# Altium PCB PCB.PcbDoc
Units mm, origin at the board's own origin, x right, y up, seen from the top; angles counter-clockwise.
Board outline 50 x 50 mm, 2 copper layers (Top Layer, Bottom Layer); 12 components, 10 nets, 38 pads, 0 vias.
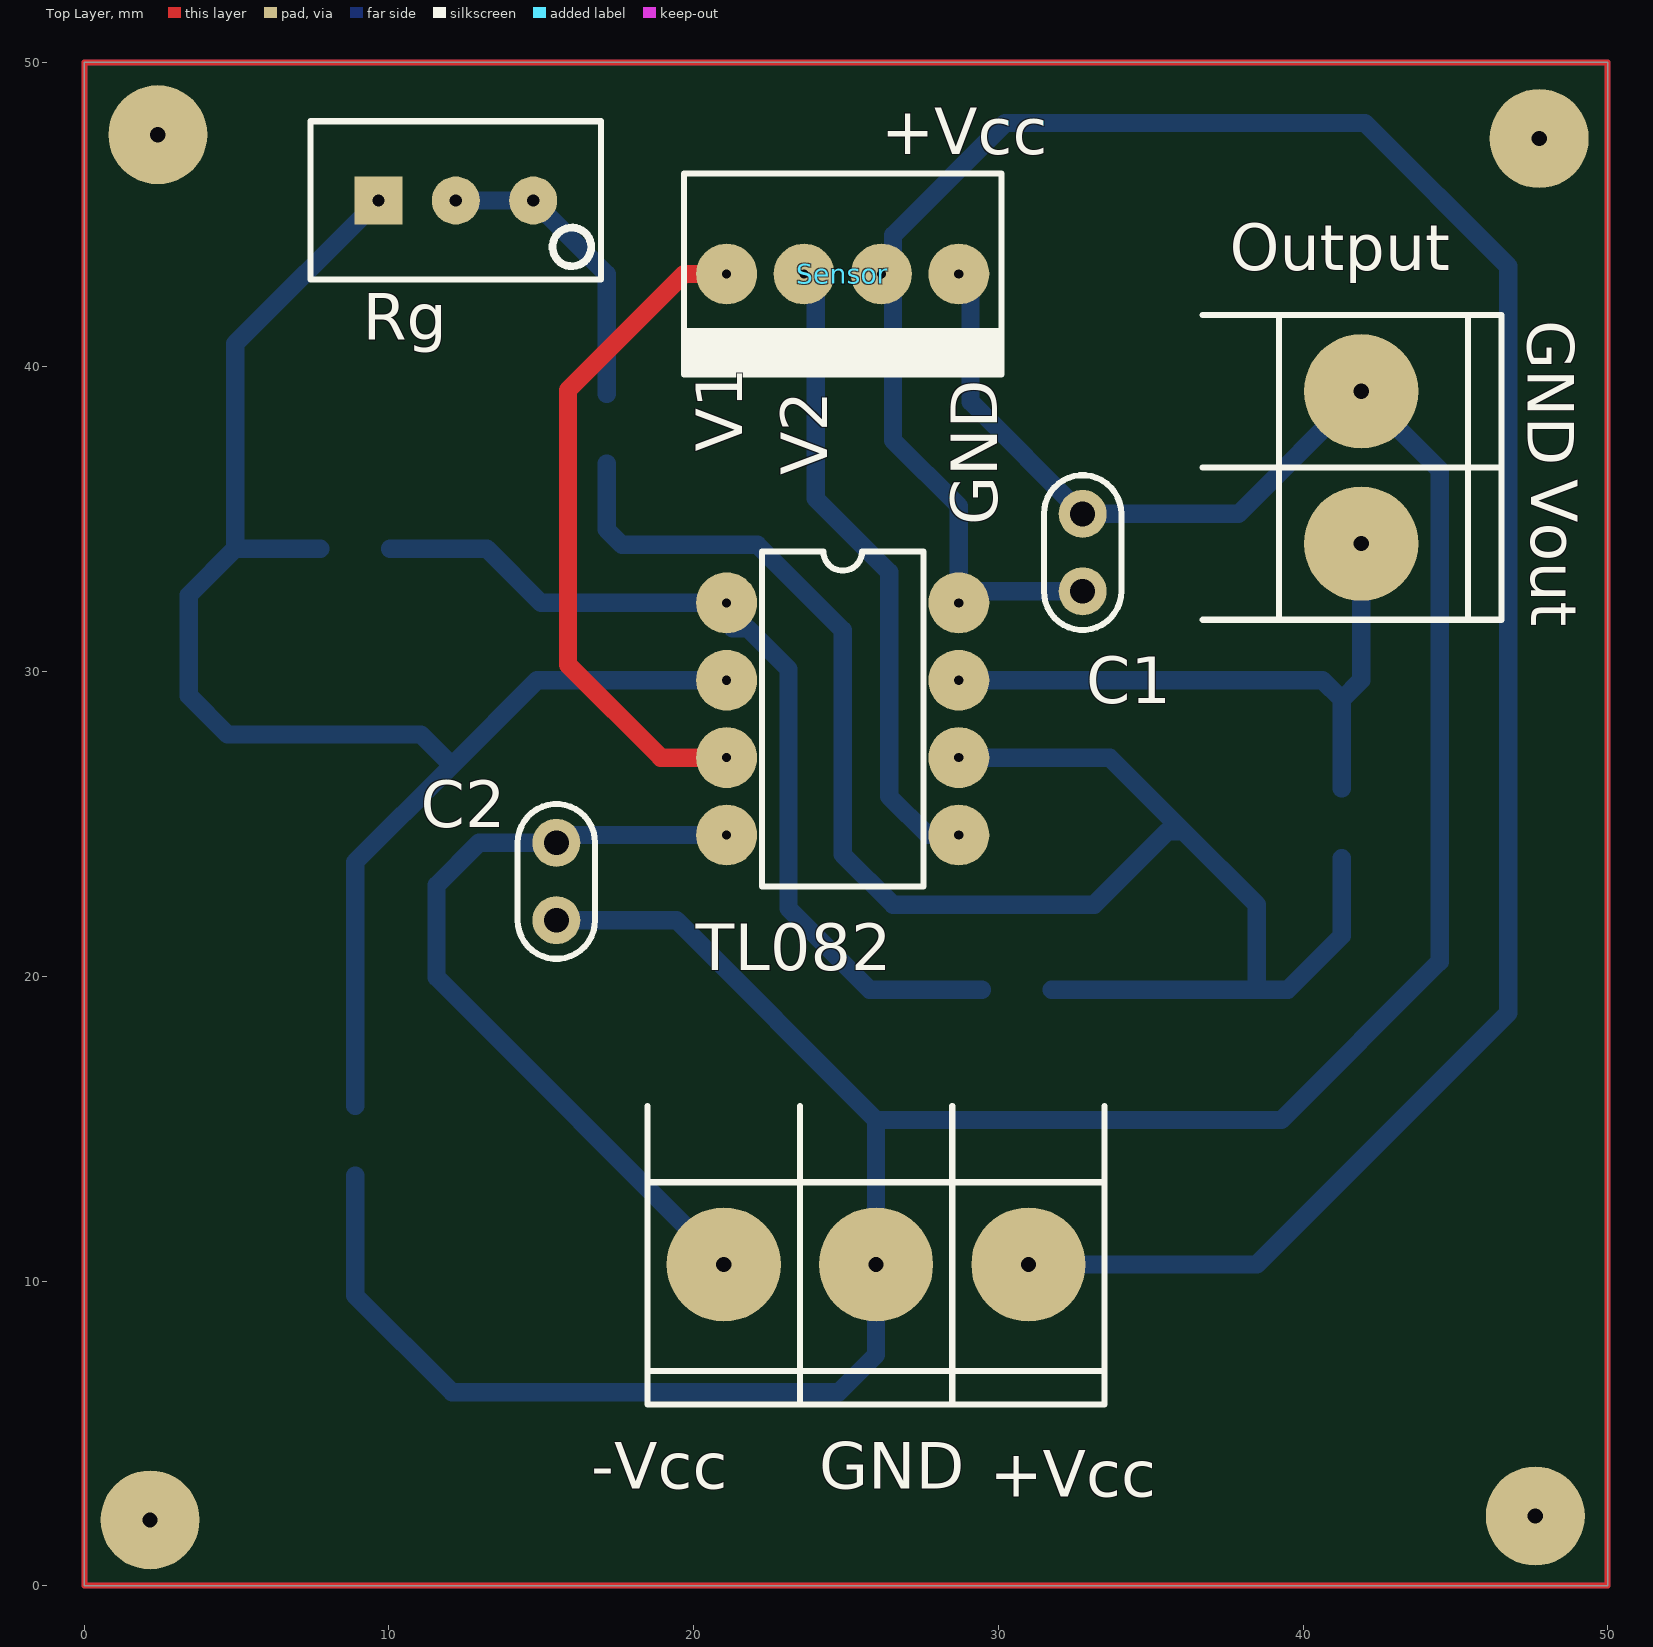
[diagram p0: Top Layer view]
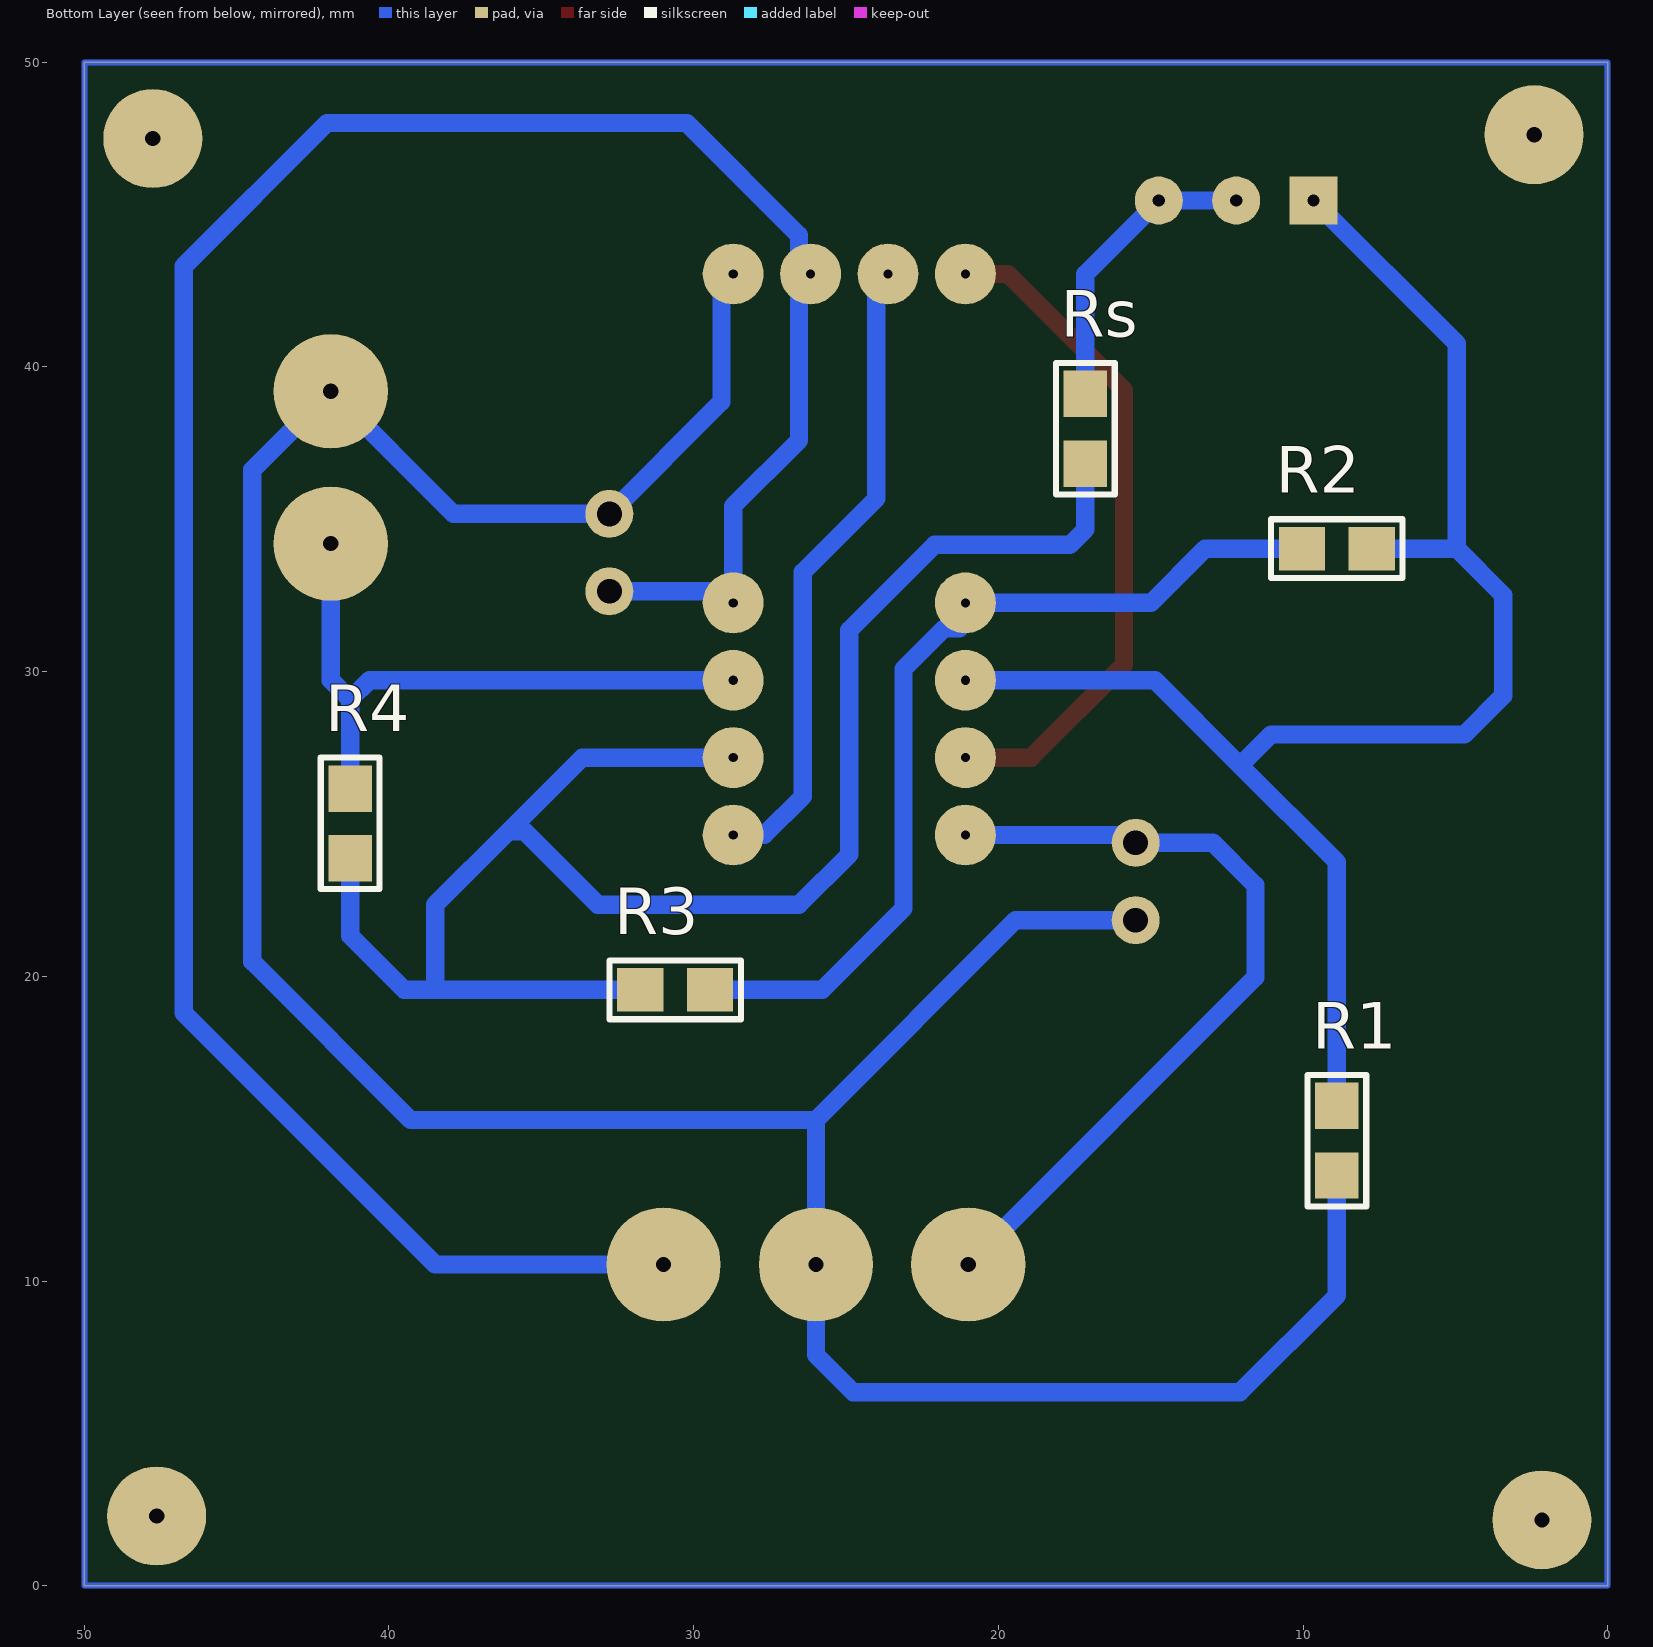
[diagram p1: Bottom Layer view, seen from below]

## Layer stack, top to bottom
Top Solder: solder mask 0.0102, Solder Resist, Dk 3.5
Top Layer: signal copper 0.0356
Dielectric 1: dielectric 0.32, FR-4, Dk 4.8
Bottom Layer: signal copper 0.0356
Bottom Solder: solder mask 0.0102, Solder Resist, Dk 3.5

## Board outline
0,0 50,0 50,50 0,50

## Design rules (kind name [scope] priority, off if disabled: settings)
Clearance [All] p1: gap=0.4 ignorepadtopadclearanceinfootprint=FALSE
PolygonConnect [All] p1: connectstyle=Relief reliefconductorwidth=0.254 reliefentries=4 polygonreliefangle="90 Angle" airgapwidth=0.254
RoutingVias [All] p1: holewidth=0.711 width=2 viastyle="Through Hole" minholewidth=0.711 minwidth=2 maxholewidth=0.711 maxwidth=2
SolderMaskExpansion [All] p1: expansion=0.102
Width [All] p1: maxlimit=0.9 minlimit=0.6 preferedwidth=0.6
30 further rules are at their usual default settings.

## Classes and differential pairs
component class Esquemarico: C1 C2 Output R1 R2 R3 R4 Rg Rs Sensor TL082

## Components (designator, comment, footprint, x,y, rotation, side; value= is the part's Value field where it differs from the comment)
Alimentacion "BORNERA 3" BORNERA3 25.988,10.541 r90 top
C1 "CAP" CAP100 32.766,33.909 r90 top
C2 "CAP" CAP100 15.494,23.114 r270 top
Output "BORNERA 2" BORNERA2 41.91,36.703 r180 top
R1 "RES" 0805 8.89,14.605 r90 bottom
R2 "RES" 0805 8.89,34.036 r0 bottom
R3 "RES" 0805 30.607,19.558 r0 bottom
R4 "RES" 0805 41.275,25.019 r90 bottom
Rg "PRESET" "PRESET V" 12.192,45.466 r0 top
Rs "RES" 0805 17.145,37.973 r270 bottom
Sensor "MOLEX4" MOLEX4 28.702,43.053 r180 top
TL082 "TL082P" P008 24.892,28.448 r270 top (schematic designator U1)

## Footprints (in the part's own frame and the unit in brackets; to place one, negate y for a bottom-side part, rotate by r counter-clockwise, add the part's x,y. Pads: shape width x height; smd on the part's side, far side on the other; paste and mask are expansions set on the pad)
0805 [mil] "Pasivo 0805"
  rect 60x56 smd: 1(-45,0) 2(45,0)
  silkscreen extent -85,-38 85,38, body extent -40,-25 39,25, height 15
BORNERA2 [mm] "Bornera con Tornillos 5mm separación"
  round 3.75 hole 0.5: 1(0,2.5) 2(0,-2.5)
  silkscreen extent -4.6,-5 5.2,5, body extent -3.76,-4.89 3.94,5.61, height 10
BORNERA3 [mm] "Bornera con Tornillos 5mm separación"
  round 3.75 hole 0.5: 1(0,5) 2(0,0) 3(0,-5)
  silkscreen extent -4.6,-7.5 5.2,7.5, body extent -3.76,-7.39 3.94,8.11, height 10.05
CAP100 [mil]
  round 62 hole 32: 1(-50,0) 2(50,0)
  silkscreen extent -100,-50 100,50, body extent -115,-33 115,34, height 241
MOLEX4 [mm]
  round 2 hole 0.3: 1(0,0) 2(2.54,0) 3(5.08,0) 4(7.62,0)
  silkscreen extent -1.4,-3.3 9.02,3.3, body extent -1.27,-3.17 8.89,3.18, height 10.74
P008 [mm] "DIP; 8 Leads; Row Spacing 7.62 mm; Pitch 2.54 mm"
  round 2 hole 0.3: 1(-3.81,-3.81) 2(-1.27,-3.81) 3(1.27,-3.81) 4(3.81,-3.81) 5(3.81,3.81) 6(1.27,3.81) 7(-1.27,3.81) 8(-3.81,3.81)
  silkscreen extent -5.5,-2.65 5.5,2.65
"PRESET V" [mil]
  rect 62x62 hole 15.75: 1(-100,0)
  round 62 hole 15.75: 2(0,0) 3(100,0)
  silkscreen extent -188,-102 188,102, body extent -185,-95 190,95, height 455

## Part data
TL082: "JFET-Input Operational Amplifier", Code_JEDEC=MO-001-AN, ComponentLink1Description="Manufacturer Link", ComponentLink1URL=http://www.ti.com/, ComponentLink2Description=Datasheet, ComponentLink2URL=http://www-s.ti.com/sc/ds/tl082.pdf, DatasheetVersion=Feb-1999, LatestRevisionDate=04-Mar-2005, LatestRevisionNote="Stylized 3D Model Added.", PackageDescription="DIP; 8 Leads; Row Spacing 7.62 mm; Pitch 2.54 mm", PackageReference=P008, PackageVersion=Jun-1999, Published=16-Jan-2001, Publisher="Altium Limited"

## Free pads (board coordinates)
  round 3.25 hole 0.5: 1(2.159,2.159) 1(2.413,47.625) 1(47.625,2.286) 1(47.752,47.498)

## Nets (pads, with @x,y where several pads share a name; then routed paths per layer and width w, separated by ;. In a path a pad name is that pad's centre, name@x,y a point inside that pad or via, vN(x,y) a via of type N, cw(c..) or ccw(c..) an arc to the next point about the centre after c; other vN are vias at no path point)
-Vcc: Alimentacion.1 C2.1 TL082.4 | length 26.6
  Bottom Layer w0.6: Alimentacion.1 11.557,19.972 11.557,22.987 12.954,24.384 C2.1 15.748,24.638 TL082.4
GND: Alimentacion.2 C1.2 C2.2 Output.2 R1.1 Sensor.1 | length 104.6
  Bottom Layer w0.6: R1.1 8.89,9.525 12.065,6.35 24.765,6.35 25.988,7.573 Alimentacion.2 25.988,15.287 ; C2.2 19.431,21.844 25.988,15.287 ; Sensor.1 29.083,42.672 29.083,38.862 C1.2 37.886,35.179 Output.2 44.485,36.628 44.485,20.482 39.29,15.287 25.988,15.287
NetR1_2: R1.2 R2.1 Rg.1 TL082.2 | length 53.9
  Bottom Layer w0.6: R2.1 4.953,34.036 ; R1.2 8.89,23.749 12.065,26.924 ; Rg.1 4.953,40.767 4.953,34.036 ; TL082.2 14.859,29.718 12.065,26.924 ; 4.953,34.036 3.429,32.512 3.429,29.21 4.699,27.94 11.049,27.94 12.065,26.924
NetR2_2: R2.2 R3.1 TL082.1 | length 30.4
  Bottom Layer w0.6: R2.2 13.208,34.036 14.986,32.258 TL082.1 21.082,31.623 21.287,31.418 21.786,31.418 23.114,30.09 23.114,22.225 25.781,19.558 R3.1
NetR3_2: R3.2 R4.1 Rs.2 TL082.6 | length 58.9
  Bottom Layer w0.6: Rs.2 17.145,34.671 17.653,34.163 22.098,34.163 24.892,31.369 24.892,24.003 26.543,22.352 33.147,22.352 35.56,24.765 36.068,24.765 ; TL082.6 33.655,27.178 36.068,24.765 ; R3.2 38.481,19.558 ; R4.1 41.275,21.336 39.497,19.558 38.481,19.558 ; 36.068,24.765 38.481,22.352 38.481,19.558
NetRg_2: Rg.2 Rg.3 Rs.1 | length 9.9
  Bottom Layer w0.6: Rg.2 Rg.3 17.145,43.053 Rs.1
V1: Sensor.4 TL082.3 | length 22.3
  Top Layer w0.6: TL082.3 18.923,27.178 15.875,30.226 15.875,39.243 19.685,43.053 Sensor.4
V2: Sensor.3 TL082.5 | length 21.1
  Bottom Layer w0.6: Sensor.3 24.003,42.672 24.003,35.687 26.416,33.274 26.416,25.908 27.686,24.638 TL082.5
Vcc: Alimentacion.3 C1.1 Sensor.2 TL082.8 | length 84.8
  Bottom Layer w0.6: Alimentacion.3 38.481,10.541 46.736,18.796 46.736,43.307 42.037,48.006 30.226,48.006 26.543,44.323 26.543,43.434 Sensor.2 26.543,42.672 26.543,37.592 28.702,35.433 TL082.8 29.083,32.639 C1.1
Vout: Output.1 R4.2 TL082.7 | length 21.1
  Bottom Layer w0.6: TL082.7 40.64,29.718 41.275,29.083 ; R4.2 41.275,29.083 ; Output.1 41.91,29.718 41.275,29.083
copper on no net: | length 600
  Top Layer w0.2: 0,0 0,50 ; 0,0 50,0 ; 0,0 0,50 ; 0,0 50,0 ; 0,50 50,50 ; 0,50 50,50 ; 50,0 50,50 ; 50,0 50,50
  Bottom Layer w0.2: 0,0 0,50 50,50 50,0 0,0

## Silkscreen, mask and mechanical layers (free items; w line width, h text height)
Top Overlay:
  text "+Vcc" at 26.162,46.99 h1.52
  text "GND" at 47.371,41.529 h1.52 r270
  text "V1" at 21.59,37.211 h1.52 r90
  text "V2" at 24.384,36.449 h1.52 r90
  text "Vout" at 47.498,36.322 h1.52 r270
  text "GND" at 29.972,34.798 h1.52 r90
  text "-Vcc" at 16.637,3.175 h1.52
  text "GND" at 24.13,3.175 h1.52
  text "+Vcc" at 29.718,2.921 h1.52
Mechanical 1:
  the board outline again, w0.1